# Altium PCB Adaptateur _J-Link.PcbDoc
Units mil, origin at the board's own origin, x right, y up, seen from the top; angles counter-clockwise.
Board outline 944.88 x 1200.79 mil, 2 copper layers (Top Layer, Bottom Layer); 2 components, 7 nets, 30 pads, 2 vias.
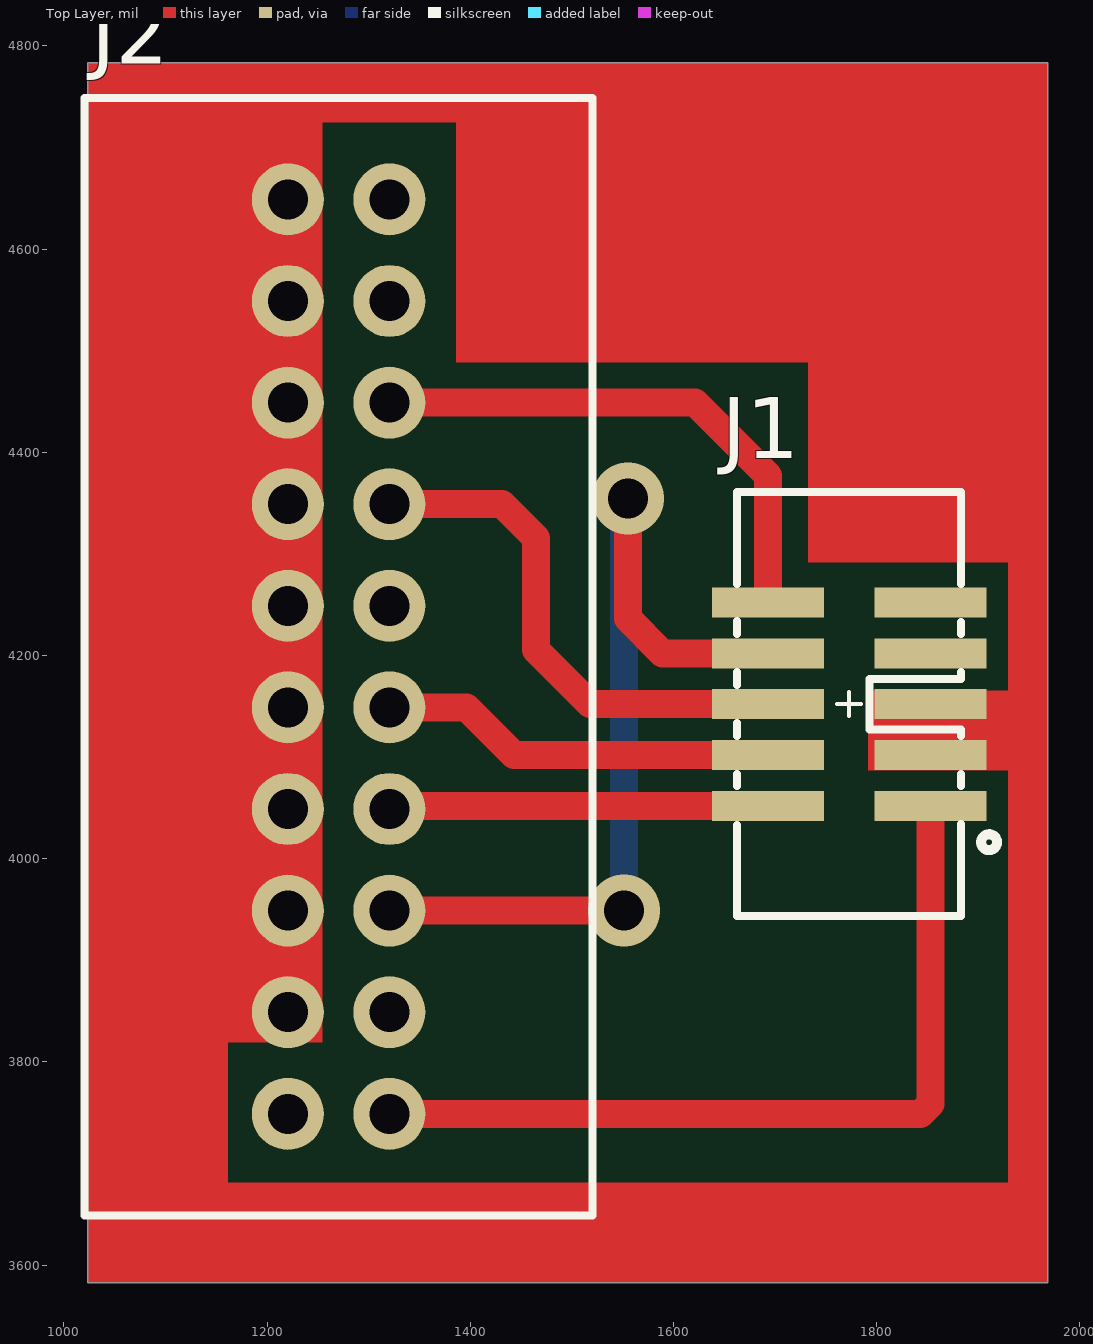
[diagram p0: Top Layer view]
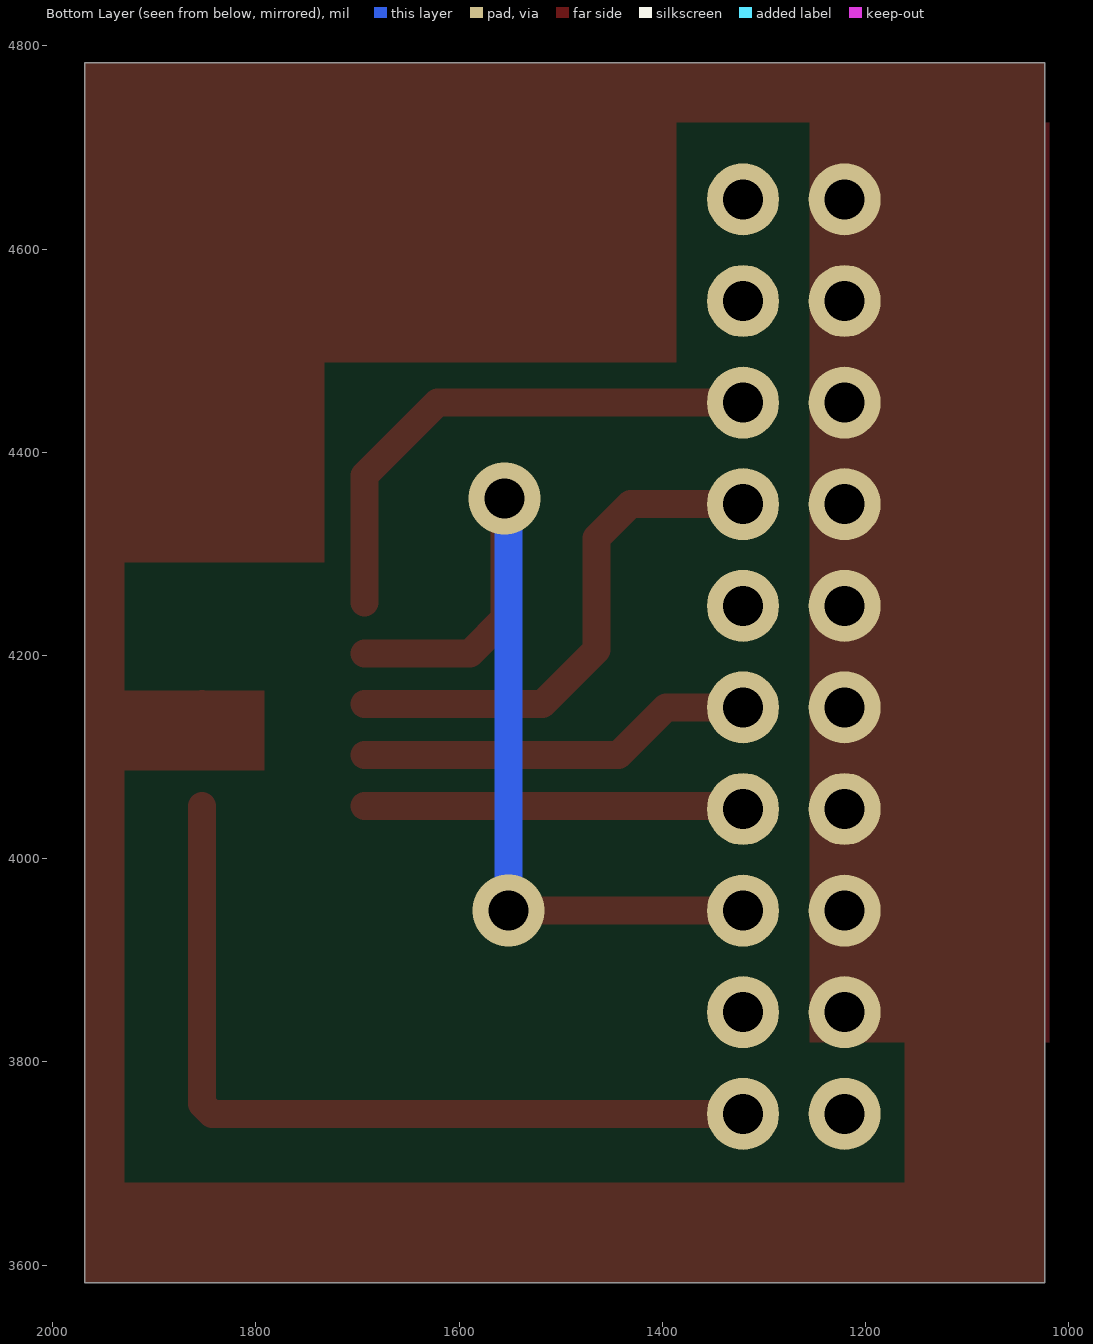
[diagram p1: Bottom Layer view, seen from below]

## Layer stack, top to bottom
Top Solder: solder mask 0.4, Solder Resist, Dk 3.5
Top Layer: signal copper 1.4
Dielectric 1: dielectric 12.6, FR-4, Dk 4.8
Bottom Layer: signal copper 1.4
Bottom Solder: solder mask 0.4, Solder Resist, Dk 3.5

## Board outline
1023.62,3582.68 1968.5,3582.68 1968.5,4783.46 1023.62,4783.46

## Design rules (kind name [scope] priority, off if disabled: settings)
Clearance [All] p1: gap=19.68
PolygonConnect [All] p1: connectstyle=Relief reliefconductorwidth=10 reliefentries=4 polygonreliefangle="90 Angle" airgapwidth=10
RoutingVias [All] p1: holewidth=39.37 width=70.87 viastyle="Through Hole" minholewidth=39.37 minwidth=70.87 maxholewidth=39.37 maxwidth=70.87
SolderMaskExpansion [All] p1: expansion=4
UnpouredPolygon [All] p1: allowunpoured=FALSE
Width [All] p1: maxlimit=1000 minlimit=15.75 preferedwidth=39.37
29 further rules are at their usual default settings.

## Components (designator, comment, footprint, x,y, rotation, side; value= is the part's Value field where it differs from the comment)
J1 "Conn_debug_10_1.27" FTSH-105-01-F-DV-K 1772.91,4151.97 r90 top
J2 "Conn_debug_20_2.54" PCBComponent_1 1320.47,3748.82 r180 top

## Footprints (in the part's own frame and the unit in brackets; to place one, negate y for a bottom-side part, rotate by r counter-clockwise, add the part's x,y. Pads: shape width x height; smd on the part's side, far side on the other; paste and mask are expansions set on the pad)
FTSH-105-01-F-DV-K [mm] "1.27mm pitch, 10 pin, terminal strip; vertical, double row, w/ejector shroud, SMT"
  rect 0.75x2.8 smd mask+0: 1(-2.54,-2.032) 2(-2.54,2.032) 3(-1.27,-2.032) 4(-1.27,2.032) 5(0,-2.032) 6(0,2.032) 7(1.27,-2.032) 8(1.27,2.032) 9(2.54,-2.032) 10(2.54,2.032)
  silkscreen extent -5.3,-3.7 5.3,2.8
PCBComponent_1 [mm]
  round 1.8 hole 1: 1(0,0) 2(2.54,0) 3(0,-2.54) 4(2.54,-2.54) 5(0,-5.08) 6(2.54,-5.08) 7(0,-7.62) 8(2.54,-7.62) 9(0,-10.16) 10(2.54,-10.16) 11(0,-12.7) 12(2.54,-12.7) 13(0,-15.24) 14(2.54,-15.24) 15(0,-17.78) 16(2.54,-17.78) 17(0,-20.32) 18(2.54,-20.32) 19(0,-22.86) 20(2.54,-22.86)
  silkscreen extent -5.08,-25.4 7.62,2.54

## Via types
v1: diameter 70.87, hole 39.37, Top Layer to Bottom Layer, 2 vias

## Nets (pads, with @x,y where several pads share a name; then routed paths per layer and width w, separated by ;. In a path a pad name is that pad's centre, name@x,y a point inside that pad or via, vN(x,y) a via of type N, cw(c..) or ccw(c..) an arc to the next point about the centre after c; other vN are vias at no path point)
NetJ1_1: J1.1 J2.1 | length 830
  Top Layer w27.56: J2.1 1843.31,3748.82 1852.91,3758.43 J1.1
NetJ1_2: J1.2 J2.7 | length 373.7
  Top Layer w27.56: J2.7 1323.62,4051.97 J1.2
NetJ1_3: J1.3 J1.5 J2.4 J2.6 J2.8 J2.10 J2.12 J2.14 J2.16 J2.18 J2.20 | length 850
  Top Layer w27.56: J1.3 J1.5
  Top Layer w39.37: J2.4 J2.6 J2.8 J2.10 J2.12 J2.14 J2.16 J2.18 J2.20
NetJ1_4: J1.4 J2.9 | length 391.8
  Top Layer w27.56: J2.9 1396.18,4148.82 1443.03,4101.97 J1.4
NetJ1_6: J1.6 J2.13 | length 518.4
  Top Layer w27.56: J2.13 1431.18,4348.82 1464.57,4315.43 1464.57,4205.43 1518.03,4151.97 J1.6
NetJ1_8: J1.8 J2.5 | length 907.9
  Top Layer w27.56: J2.5 v1(1551.18,3948.82) ; v1(1555.12,4354.33) 1555.12,4236.22 1589.37,4201.97 J1.8
  Bottom Layer w27.56: v1(1551.18,3948.82) 1551.18,4350.39 v1(1555.12,4354.33)
NetJ1_10: J1.10 J2.15 | length 527.3
  Top Layer w27.56: J2.15 1621.18,4448.82 1692.91,4377.09 J1.10
pads on no net: J1.7 J1.9 J2.2 J2.3 J2.11 J2.17 J2.19

## Other copper
Top Layer:
  rectangle net NetJ1_3: 1929.13,3681.1 1968.5,4094.49
  rectangle net NetJ1_3: 1161.42,3582.68 1968.5,3681.1
  rectangle net NetJ1_3: 1023.62,3582.68 1161.42,3818.9
  rectangle net NetJ1_3: 1385.83,4488.19 1744.09,4724.41
  rectangle net NetJ1_3: 1732.28,4291.34 1929.13,4771.65
  rectangle net NetJ1_3: 1929.13,4165.35 1968.5,4173.23
  rectangle net NetJ1_3: 1791.34,4086.61 1968.5,4165.35
  rectangle net NetJ1_3: 1929.13,4173.23 1968.5,4724.41
  rectangle net NetJ1_3: 1023.62,4724.41 1968.5,4783.46
  rectangle net NetJ1_3: 1018.62,3818.9 1254.84,4724.41

## Silkscreen, mask and mechanical layers (free items; w line width, h text height)
Mechanical 1:
  the board outline again, w7.87